# Altium PCB Emergency.PcbDoc
Units mm, origin at the board's own origin, x right, y up, seen from the top; angles counter-clockwise.
Board outline 67.25 x 64 mm, 2 copper layers (Top Layer, Bottom Layer); 11 components, 9 nets, 38 pads, 215 vias.
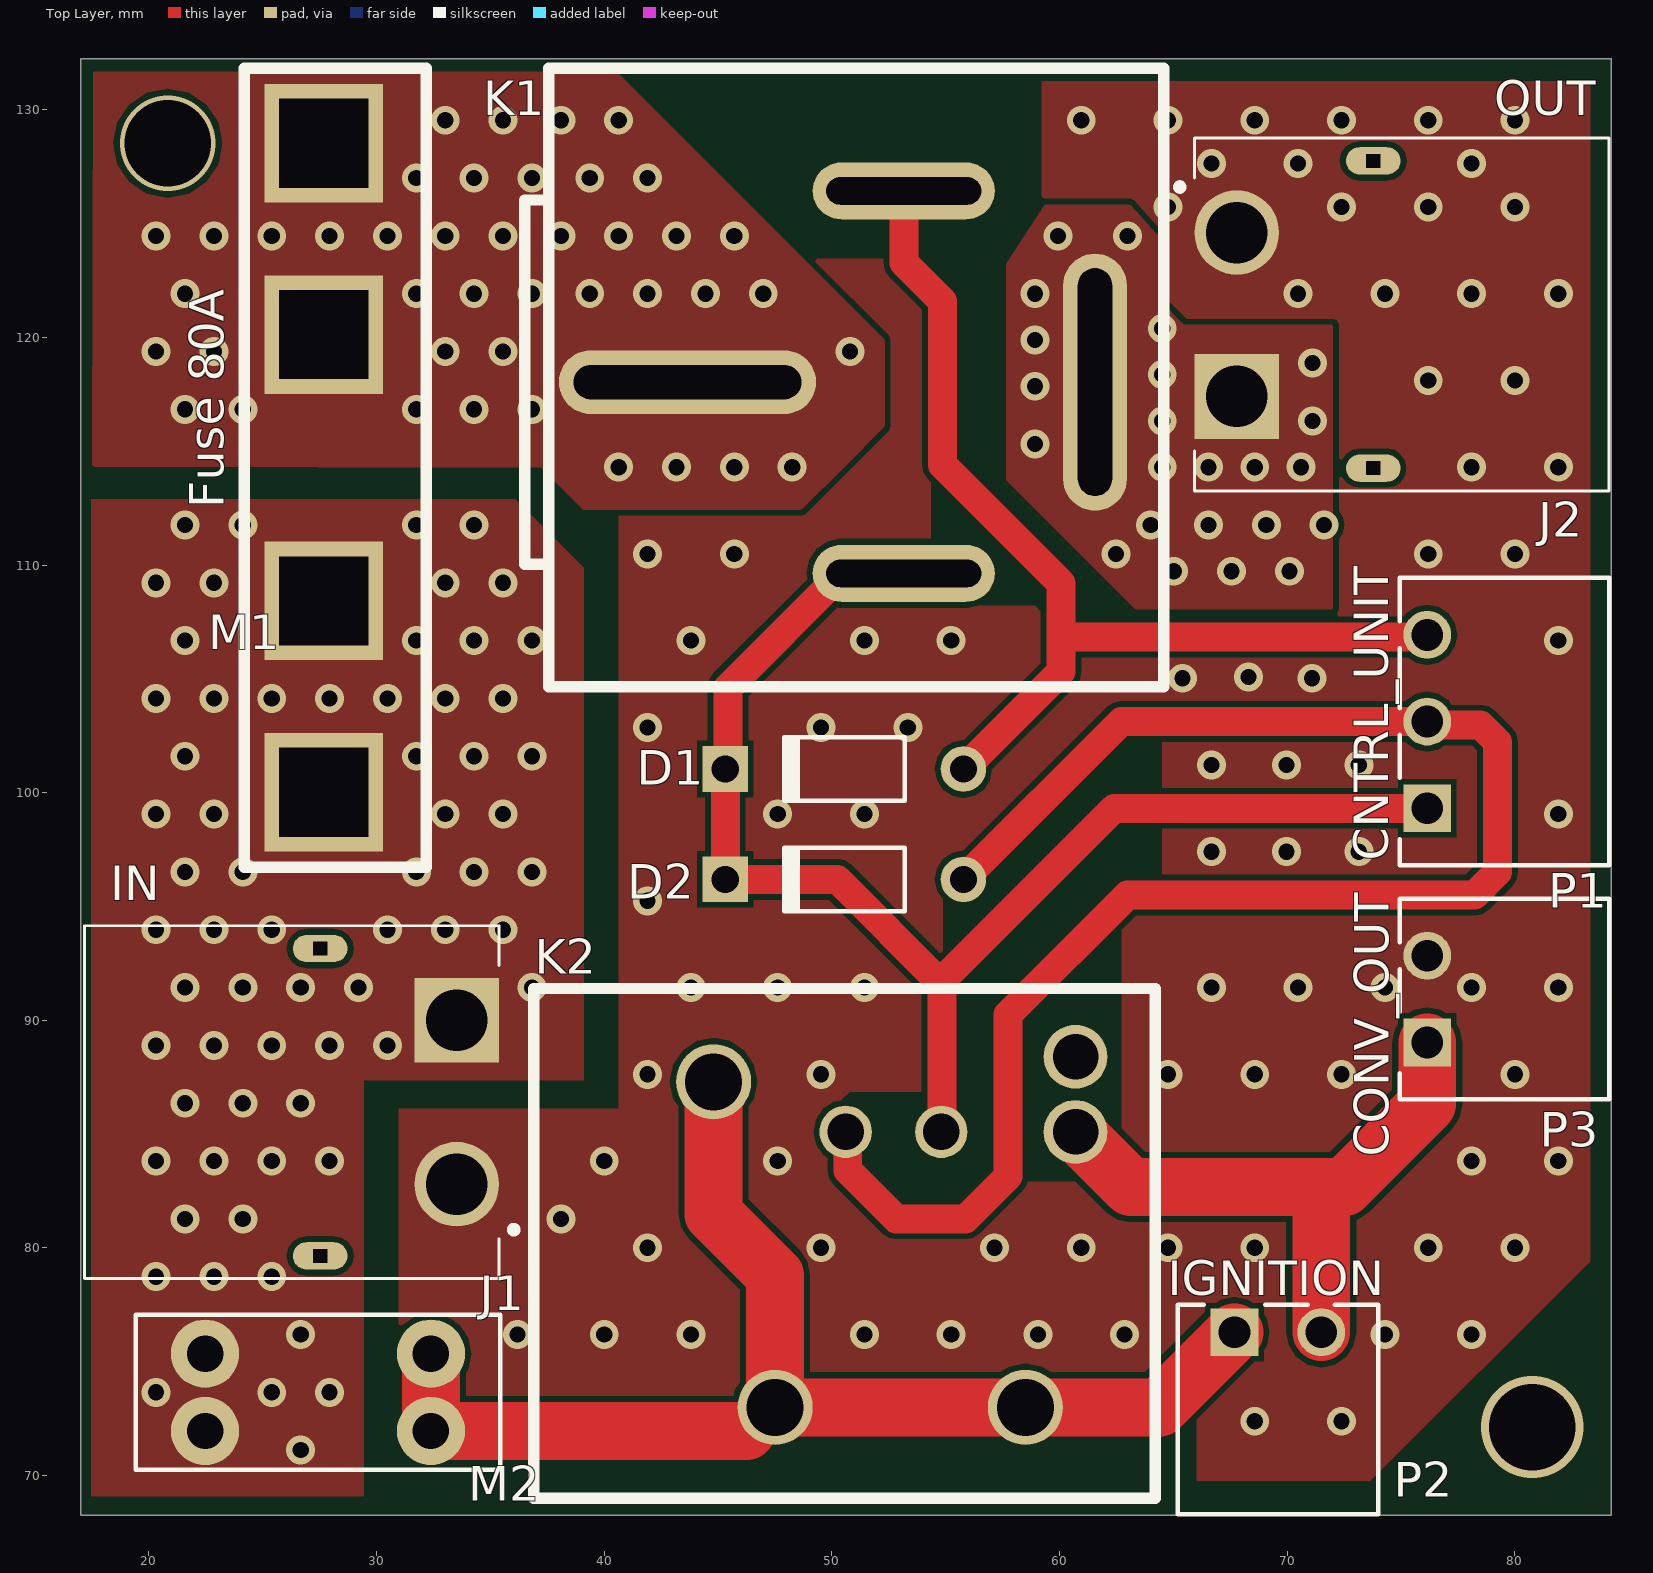
[diagram p0: Top Layer view]
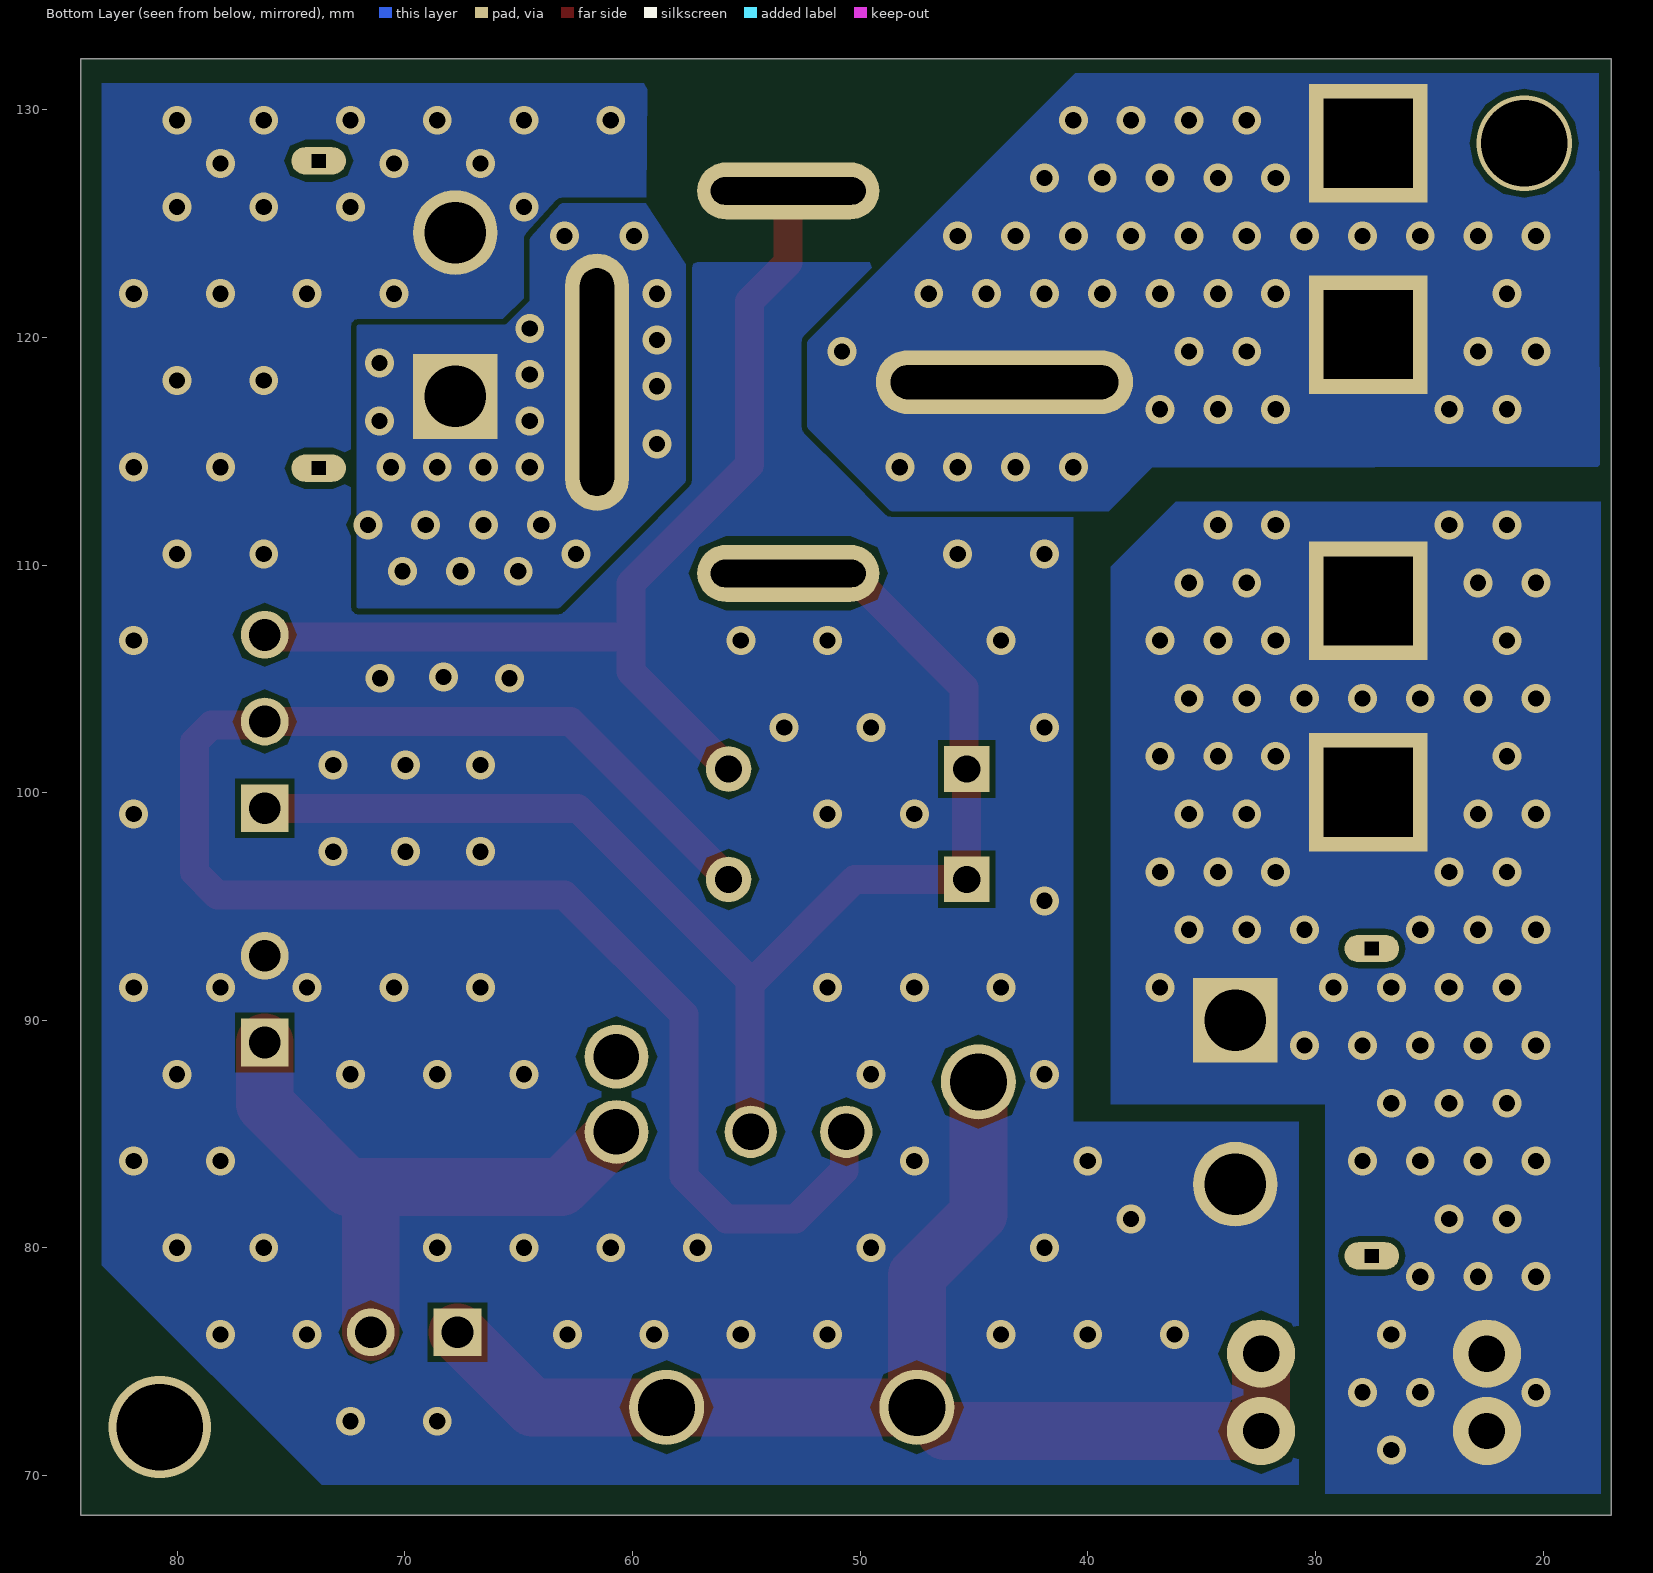
[diagram p1: Bottom Layer view, seen from below]

## Layer stack, top to bottom
Top Solder: solder mask 0.0102, Solder Resist, Dk 3.5
Top Layer: signal copper 0.0356
Dielectric 1: dielectric 0.32, FR-4, Dk 4.8
Bottom Layer: signal copper 0.0356
Bottom Solder: solder mask 0.0102, Solder Resist, Dk 3.5

## Board outline
17,68.25 17,132.25 84.25,132.25 84.25,68.25

## Design rules (kind name [scope] priority, off if disabled: settings)
Clearance "Stitching GND" [IsStitchingVia and InNet('GND') vs (IsVia and (Not IsStitchingVia)) Or IsPad] p1: gap=0.127 ignorepadtopadclearanceinfootprint=FALSE
Clearance [All] p2: gap=0.254 ignorepadtopadclearanceinfootprint=FALSE except(0: Arc-Hole Track-Hole SMDPad-Hole THPad-Hole Via-Hole Fill-Hole Poly-Hole Region-Hole Text-Hole)
HoleSize [All] p1: absolutevalues=TRUE maxlimit=25.4 minlimit=0.025 maxpercent=80.000 minpercent=20.000
PolygonConnect [All] p1: connectstyle=Direct reliefconductorwidth=0.254 reliefentries=4 polygonreliefangle="90 Angle" airgapwidth=0.254
RoutingVias [All] p1: holewidth=0.711 width=1.27 viastyle="Through Hole" minholewidth=0.711 minwidth=1.27 maxholewidth=101.6 maxwidth=127
SolderMaskExpansion [All] p1: expansion=0.102 istentingtop=FALSE
Width [All] p1: maxlimit=150 minlimit=0.254 preferedwidth=5
29 further rules are at their usual default settings.

## Classes and differential pairs
component class Emergancy: D1 D2 J1 J2 K1 M1 M2 P1 P2 P3

## Components (designator, comment, footprint, x,y, rotation, side; value= is the part's Value field where it differs from the comment)
D1 "Diode 1N4001" DO-41 50.555,101.041 r180 top
D2 "Diode 1N4001" DO-41 50.555,96.19 r180 top
J1 "XT60PW-M" AMASS_XT60PW-M 27.528,86.404 r90 top
J2 "XT60PW-M" AMASS_XT60PW-M 73.787,121.006 r270 top
K1 "Relay" "RL800 12V 80A" 63.563,105.034 r90 top
K2 "Relay" "TRKP 12V 40A" 64.208,70.4 r0 top
M1 "FUSE HOLDER 80A_PCB" "FUSE HOLDER 80A PCB" 27.686,128.524 r270 top
M2 "FUSE HOLDER 5A" "KEYSTONE 3568" 27.432,73.66 r180 top
P1 "691322310003" 691322310003 79.557,103.124 r90 top
P2 "691322310002" 691322310002 69.596,72.898 r0 top
P3 "691322310002" 691322310002 79.557,90.932 r90 top

## Footprints (in the part's own frame and the unit in brackets; to place one, negate y for a bottom-side part, rotate by r counter-clockwise, add the part's x,y. Pads: shape width x height; smd on the part's side, far side on the other; paste and mask are expansions set on the pad)
691322310002 [mm] "Horizontal PCB Header, pitch 3.81mm, 02p"
  rect 2.1x2.1 hole 1.4: 1(-1.905,3.4)
  round 2.1 hole 1.4: 2(1.905,3.4)
  silkscreen extent -4.4,-4.6 4.41,4.6, body extent -4.4,-4.6 4.41,4.6, height 7.25
691322310003 [mm] "Horizontal PCB Header, pitch 3.81mm, 03p"
  rect 2.1x2.1 hole 1.4: 1(-3.81,3.4)
  round 2.1 hole 1.4: 2(0,3.4) 3(3.81,3.4)
  silkscreen extent -6.31,-4.6 6.31,4.6, body extent -6.31,-4.6 6.31,4.6, height 7.25
AMASS_XT60PW-M [mm]
  round 3.716 hole 2.7: 1(-3.6,-6)
  rect 3.716x3.716 hole 2.7: 2(3.6,-6)
  oval 1.2x2.4 hole 0.6 square: S1(-6.75,0) S2(6.75,0)
  silkscreen extent -7.75,-8.65 7.75,10.35, body extent -8,-7.93 8,10.47, height 8.5
DO-41 [mm] "Diode, Axial; Body 5.2 x 2.7 mm (LxDia. max), Lead Dia. 0.86 mm (max)"
  round 2 hole 1.2: 1(-5.23,0)
  rect 2x2 hole 1.2: 2(5.23,0)
  silkscreen extent -2.65,-1.4 2.75,1.4
"FUSE HOLDER 80A PCB" [mm]
  rect 5.2x5.2 hole 3.9 square: 1(0,0) 1(8.4,0) 2(20.1,0) 2(28.5,0)
  silkscreen extent -3.3,-3.5 31.8,4.5, body extent -0.81,-0.89 29.26,3.61, height 11
"KEYSTONE 3568" [mm] "MINI PC AUTO-FUSE HOLDER"
  round 3 hole 1.6: 1(-4.96,-1.7) 1(-4.96,1.7) 2(4.96,-1.7) 2(4.96,1.7)
  silkscreen extent -8,-3.4 8,3.4, body extent -8,-3.37 8,3.37, height 7.37
"RL800 12V 80A" [mm] "Mini Röle 12V 80A Güç Rölesi 4 Fişli ÜSTÜN RL800"
  oval 2.8x11.3 hole 10 slot 1.5 at 0 deg: 1(13,19.9)
  oval 11.3x2.8 hole 10 slot 1.5 at 90 deg: 2(13,2)
  oval 2.5x8 hole 6.8 slot 1.2 at 0 deg: 3(4.6,10.4) 4(21.4,10.4)
  silkscreen extent -0.38,-1.02 26.8,27.05, body extent 0.21,-0.55 26.21,25.45, height 22.8
"TRKP 12V 40A" [mm] "TRKP L-S-Z1/12VDC - RELAY 40A 12VDC FORMC"
  round 3.3 hole 2.5: 1(-19.4,16.9) 2(-16.7,2.6) 3(-5.7,2.6)
  round 2.8 hole 2: 4(-3.5,18) 5(-3.5,14.7)
  round 2.3 hole 1.6: 6(-9.4,14.7) 7(-13.6,14.7)
  silkscreen extent -27.3,-1.4 0,21, body extent -26.42,-0.76 -0.42,20.24, height 20.9

## Part data
D1 D2: "1 Amp General Purpose Rectifier", Code_JEDEC=DO-204-AL, ComponentLink1Description="Manufacturer Link", ComponentLink1URL=http://www.fairchildsemi.com/, ComponentLink2Description=Datasheet, ComponentLink2URL=http://www.fairchildsemi.com/ds/1N%2F1N4001.pdf, DatasheetVersion=1998, LatestRevisionDate=17-Jul-2002, LatestRevisionNote="Re-released for DXP Platform.", PackageDescription="Diode, Axial; Body 5.2 x 2.7 mm (LxDia. max), Lead Dia. 0.86 mm (max)", PackageReference=DO-41, PackageVersion=Aug-1999, Published=8-Jun-2000, Publisher="Altium Limited"
J1 J2: Package="Package Analog Devices", Availability=Unavailable, MF=AMASS, MP=XT60PW-M, Price=None, SnapEDA_Link=https://www.snapeda.com/parts/XT60PW-M%20/AMASS/view-part/3075559/?ref=snap
K1: library part "RL800 12V 80A", "Mini Röle 12V 80A Güç Rölesi 4 Fişli ÜSTÜN RL800", ComponentLink1Description="New link", ComponentLink1URL=https://urun.n11.com/role/mini-role-12v-80a-guc-rolesi-4-fisli-ustun-rl800-P368080847
K2: library part "TRKP 12V 40A", "TRKP L-S-Z1/12VDC - RELAY 40A 12VDC FORMC", ComponentLink1Description="New link", ComponentLink1URL=https://ozdisan.com/elektromekanik-komponentler/roleler-ve-role-soketleri/genel-tip-roleler/TRKP-L-S-Z112VDC
M1: "80A Automative Fuse Holder PCB Baglantisi", ComponentLink1Description="New link", ComponentLink1URL=http://www.farnell.com/datasheets/1703972.pdf
M2: "5A Automative Fuse Holder Keystone 3568"
P1: "WR-TBL Serie 322 Horizontal PCB Header, Pluggable, pitch 3.81mm, 3p", Operating Temperature="-40 to +105degC", Rated Current [UL]=10A, Working Voltage [UL]=300VAC, Application=Pluggable, Compliance=RoHS, ComponentLink1Description=Manufacturer, ComponentLink1URL=http://www.we-online.de, ComponentLink2Description=Datasheet, ComponentLink2URL=https://katalog.we-online.de/em/datasheet/691322310003.pdf, Modularity=No, Mounting Technology=THT, Packaging=Box, Part Number=691322310003, PCB/Cable/Panel=PCB, Pin Number=3, Pitch=3.81mm, Published Date="October 2019", Publisher="Wurth Elektronik", Type=Horizontal
P2 P3: "WR-TBL Serie 322 Horizontal PCB Header, Pluggable, pitch 3.81mm, 2p", Operating Temperature="-40 to +105degC", Rated Current [UL]=10A, Working Voltage [UL]=300VAC, Application=Pluggable, Compliance=RoHS, ComponentLink1Description=Manufacturer, ComponentLink1URL=http://www.we-online.de, ComponentLink2Description=Datasheet, ComponentLink2URL=https://katalog.we-online.de/em/datasheet/691322310002.pdf, Modularity=No, Mounting Technology=THT, Packaging=Box, Part Number=691322310002, PCB/Cable/Panel=PCB, Pin Number=2, Pitch=3.81mm, Published Date="October 2019", Publisher="Wurth Elektronik", Type=Horizontal

## Via types
v1: diameter 1.27, hole 0.711, Top Layer to Bottom Layer, 213 vias
v2: diameter 4.5, hole 3.8, Top Layer to Bottom Layer, 1 vias
v3: diameter 4.2, hole 3.8, Top Layer to Bottom Layer, 1 vias

## Nets (pads, with @x,y where several pads share a name; then routed paths per layer and width w, separated by ;. In a path a pad name is that pad's centre, name@x,y a point inside that pad or via, vN(x,y) a via of type N, cw(c..) or ccw(c..) an arc to the next point about the centre after c; other vN are vias at no path point)
+12: D1.2 D2.2 K1.3 K2.6 P1.1 | length 60.8
  Top Layer w1.27: K1.3@53.173,109.6 50.423,109.6 45.441,104.618 45.441,101.157 D1.2 D2.2 50.241,96.19 54.839,91.592 ; K2.6 54.839,85.131 54.839,91.592 ; P1.1 62.408,99.314 54.839,91.745 54.839,91.592
GND: J1.1 J2.1 P3.2
  other v1: 68.58,72.39 72.39,72.39 36.195,76.2 40.005,76.2 43.815,76.2 51.435,76.2 55.245,76.2 59.055,76.2 62.865,76.2 74.295,76.2 78.105,76.2 41.91,80.01 49.53,80.01 57.15,80.01 60.96,80.01 64.77,80.01 68.58,80.01 76.2,80.01 80.01,80.01 38.1,81.28 40.005,83.82 47.625,83.82 78.105,83.82 81.915,83.82 41.91,87.63 49.53,87.63 64.77,87.63 68.58,87.63 72.39,87.63 80.01,87.63 43.815,91.44 47.625,91.44 51.435,91.44 66.675,91.44 70.485,91.44 74.295,91.44 78.105,91.44 81.915,91.44 41.91,95.25 66.675,97.409 69.977,97.409 73.152,97.409 47.625,99.06 51.435,99.06 81.915,99.06 66.675,101.219 69.977,101.219 73.152,101.219 41.91,102.87 49.53,102.87 53.34,102.87 65.405,105.029 71.095,105.029 68.301,105.08 43.815,106.68 51.435,106.68 55.245,106.68 81.915,106.68 41.91,110.49 45.72,110.49 76.2,110.49 80.01,110.49 78.105,114.3 81.915,114.3 76.2,118.11 80.01,118.11 70.485,121.92 74.295,121.92 78.105,121.92 81.915,121.92 64.77,125.73 72.39,125.73 76.2,125.73 80.01,125.73 66.675,127.635 70.485,127.635 78.105,127.635 60.96,129.54 64.77,129.54 68.58,129.54 72.39,129.54 76.2,129.54 80.01,129.54
NetD1_1: D1.1 K1.4 P1.3 | length 45.8
  Top Layer w1.27: K1.4@53.173,126.4 53.173,123.281 54.864,121.59 54.864,114.402 60.071,109.195 60.071,106.84 ; D1.1 55.797,101.041 60.071,105.315 60.071,106.84 ; P1.3@75.848,106.934 75.754,106.84 60.071,106.84
NetD2_1: D2.1 K2.7 P1.2 | length 74
  Top Layer w1.27: K2.7 50.7,85.008 50.7,83.412 52.832,81.28 55.88,81.28 57.75,83.15 57.75,90.262 62.992,95.504 78.232,95.504 79.248,96.52 79.248,102.221 78.504,102.965 76.316,102.965 P1.2 62.72,103.124 D2.1
NetJ2_2: J2.2 K1.2
  other v1: 65.024,109.728 67.564,109.728 70.104,109.728 62.484,110.49 64.008,111.76 66.548,111.76 69.088,111.76 71.628,111.76 64.516,114.3 66.548,114.3 68.58,114.3 70.612,114.3 58.928,115.316 64.516,116.332 71.12,116.332 58.928,117.856 64.516,118.364 71.12,118.872 58.928,119.888 64.516,120.396 58.928,121.92 59.944,124.46 62.992,124.46
NetK1_1: K1.1 M1.1
  other v1: 40.64,114.3 43.18,114.3 45.72,114.3 48.26,114.3 21.59,116.84 24.13,116.84 31.75,116.84 34.29,116.84 36.83,116.84 20.32,119.38 22.86,119.38 33.02,119.38 35.56,119.38 50.8,119.38 21.59,121.92 31.75,121.92 34.29,121.92 36.83,121.92 39.37,121.92 41.91,121.92 44.45,121.92 46.99,121.92 20.32,124.46 22.86,124.46 25.4,124.46 27.94,124.46 30.48,124.46 33.02,124.46 35.56,124.46 38.1,124.46 40.64,124.46 43.18,124.46 45.72,124.46 31.75,127 34.29,127 36.83,127 39.37,127 41.91,127 33.02,129.54 35.56,129.54 38.1,129.54 40.64,129.54
NetK2_1: K2.1 K2.2 K2.3 M2.1 P2.1 | length 54.2
  Top Layer w2.54: M2.1@32.392,75.36 32.392,71.96 K2.2@46.262,71.96 ; K2.1 44.808,81.5 47.508,78.8 K2.2 K2.3 64.393,73 P2.1
NetK2_5: K2.5 P2.2 P3.1 | length 27.1
  Top Layer w2.54: K2.5 63.131,82.677 71.374,82.677 ; P2.2 71.501,82.55 71.374,82.677 ; P3.1 76.157,86.317 72.517,82.677 71.374,82.677
VCC: J1.2 M1.2 M2.2 | length 0
  other v1: 26.67,71.12 20.32,73.66 25.4,73.66 27.94,73.66 26.67,76.2 20.32,78.74 22.86,78.74 25.4,78.74 21.59,81.28 24.13,81.28 20.32,83.82 22.86,83.82 25.4,83.82 27.94,83.82 21.59,86.36 24.13,86.36 26.67,86.36 20.32,88.9 22.86,88.9 25.4,88.9 27.94,88.9 30.48,88.9 21.59,91.44 24.13,91.44 26.67,91.44 29.21,91.44 36.83,91.44 20.32,93.98 22.86,93.98 25.4,93.98 30.48,93.98 33.02,93.98 35.56,93.98 21.59,96.52 24.13,96.52 31.75,96.52 34.29,96.52 36.83,96.52 20.32,99.06 22.86,99.06 33.02,99.06 35.56,99.06 21.59,101.6 31.75,101.6 34.29,101.6 36.83,101.6 20.32,104.14 22.86,104.14 25.4,104.14 27.94,104.14 30.48,104.14 33.02,104.14 35.56,104.14 21.59,106.68 31.75,106.68 34.29,106.68 36.83,106.68 20.32,109.22 22.86,109.22 33.02,109.22 35.56,109.22 21.59,111.76 24.13,111.76 31.75,111.76 34.29,111.76
pads on no net: J1.S1 J1.S2 J2.S1 J2.S2 K2.4
copper on no net:
  other v2: 80.772,72.136
  other v3: 20.828,128.524

## Polygon pours and split planes (outlines as drawn)
GND on Top Layer "GND_L01_P013" (solid, remove dead copper, pour order 13): 61.669,131.242 40.64,131.242 40.64,106.015 40.64,96.698 40.64,86.106 30.988,86.106 30.988,69.774 73.66,69.774 83.312,79.426 83.312,131.242
NetJ2_2 on Top Layer "NETJ2_2_L01_P008" (solid, pour order 8): 57.607,113.614 63.17,108.052 72.009,108.052 72.009,120.548 65.481,120.548 64.465,121.564 64.465,124.308 63.094,125.832 59.36,125.832 57.607,123.157
NetK1_1 on Top Layer "NETK1_1_L01_P006" (solid, pour order 6): 17.505,114.324 37.242,114.279 39.09,112.431 48.666,112.431 52.324,116.089 52.324,119.898 40.563,131.659 17.551,131.659
VCC on Top Layer "VCC_L01_P000" (solid, pour order 0): 17.475,112.764 17.475,112.893 36.104,112.893 39.116,109.88 39.116,96.571 39.116,87.376 29.439,87.376 29.439,85.039 29.439,69.088 17.475,69.088 17.475,112.726
GND on Bottom Layer "GND_L02_P010" (solid, remove dead copper, pour order 10): 40.64,131.155 40.64,105.837 40.64,85.547 37.703,85.547 36.368,85.547 35.286,85.547 30.734,85.547 30.734,69.596 73.66,69.596 83.312,79.248 83.312,131.155
NetJ2_2 on Bottom Layer "NETJ2_2_L02_P009" (solid, pour order 9): 57.658,113.665 63.221,108.102 72.111,108.102 72.111,120.548 65.583,120.548 64.516,121.615 64.516,124.358 63.144,125.882 59.411,125.882 57.658,123.208
NetK1_1 on Bottom Layer "NETK1_1_L02_P004" (solid, pour order 4): 17.505,114.312 37.193,114.267 39.091,112.37 48.666,112.37 52.324,116.027 52.324,119.837 40.564,131.597 17.551,131.597
VCC on Bottom Layer "VCC_L02_P001" (solid, pour order 1): 17.475,112.787 36.133,112.787 38.989,109.931 38.989,96.368 38.989,94.855 38.989,86.306 38.755,86.306 38.238,86.306 36.039,86.306 35.792,86.306 34.778,86.306 29.581,86.306 29.581,69.2 17.475,69.2

## Other copper
Top Layer:
  pour cut-out: 30.48,71.12 45.72,71.12 48.26,73.66 66.04,73.66 66.04,68.58 30.48,68.58
  pour cut-out: 50.423,86.504 50.787,86.868 54.864,86.868 54.864,81.28 52.832,81.28 52.832,81.788 50.423,84.197
  pour cut-out: 62.484,103.357 54.864,96.187 54.864,81.28 58.078,83.312 58.078,89.75 64.516,96.187 64.516,98.552 64.516,102.616
  pour cut-out: 57.658,124.84 57.658,113.716 63.5,107.874 63.5,107.188 59.944,107.188 58.928,108.204 54.356,108.204 54.356,109.728 54.356,114.3 54.356,121.082 54.864,121.59 53.173,123.281 53.173,124.84 53.212,124.84 56.261,124.84
  pour cut-out: 57.455,124.286 59.233,126.064 59.233,131.242 41.275,131.242 48.971,123.546 48.971,123.444 57.455,123.444
  pour cut-out: 58.647,89.891 58.616,89.86 58.616,82.918 62.598,82.918 62.738,83.058 62.738,93.98 58.649,89.891
Bottom Layer:
  pour cut-out: 57.311,123.292 49.149,123.292 41.275,131.166 59.157,131.166 59.358,130.964 59.411,126.141 59.309,126.087 58.407,124.701 57.658,123.698

## Silkscreen, mask and mechanical layers (free items; w line width, h text height)
Top Overlay:
  text "OUT" at 79.105,129.764 h1.52
  text "Fuse 80A" at 23.292,112.497 h1.52 r90
  text "CNTRL_UNIT" at 74.447,97.003 h1.52 r90
  text "IN" at 18.311,95.284 h1.52
  text "CONV_OUT" at 74.46,84.002 h1.52 r90
  text "IGNITION" at 64.764,77.929 h1.52
Mechanical 1:
  lines w0.5: 84.048,68.25 17,68.25 17,132.25 84.048,132.25 ; 84.25,68.25 84.25,132.25